# Altium PCB 202004A830.PcbDoc
Units mil, origin at the board's own origin, x right, y up, seen from the top; angles counter-clockwise.
Board outline 1891.85 x 1891.66 mil, 2 copper layers (Top Layer, Bottom Layer); 51 components, 32 nets, 164 pads, 342 vias.
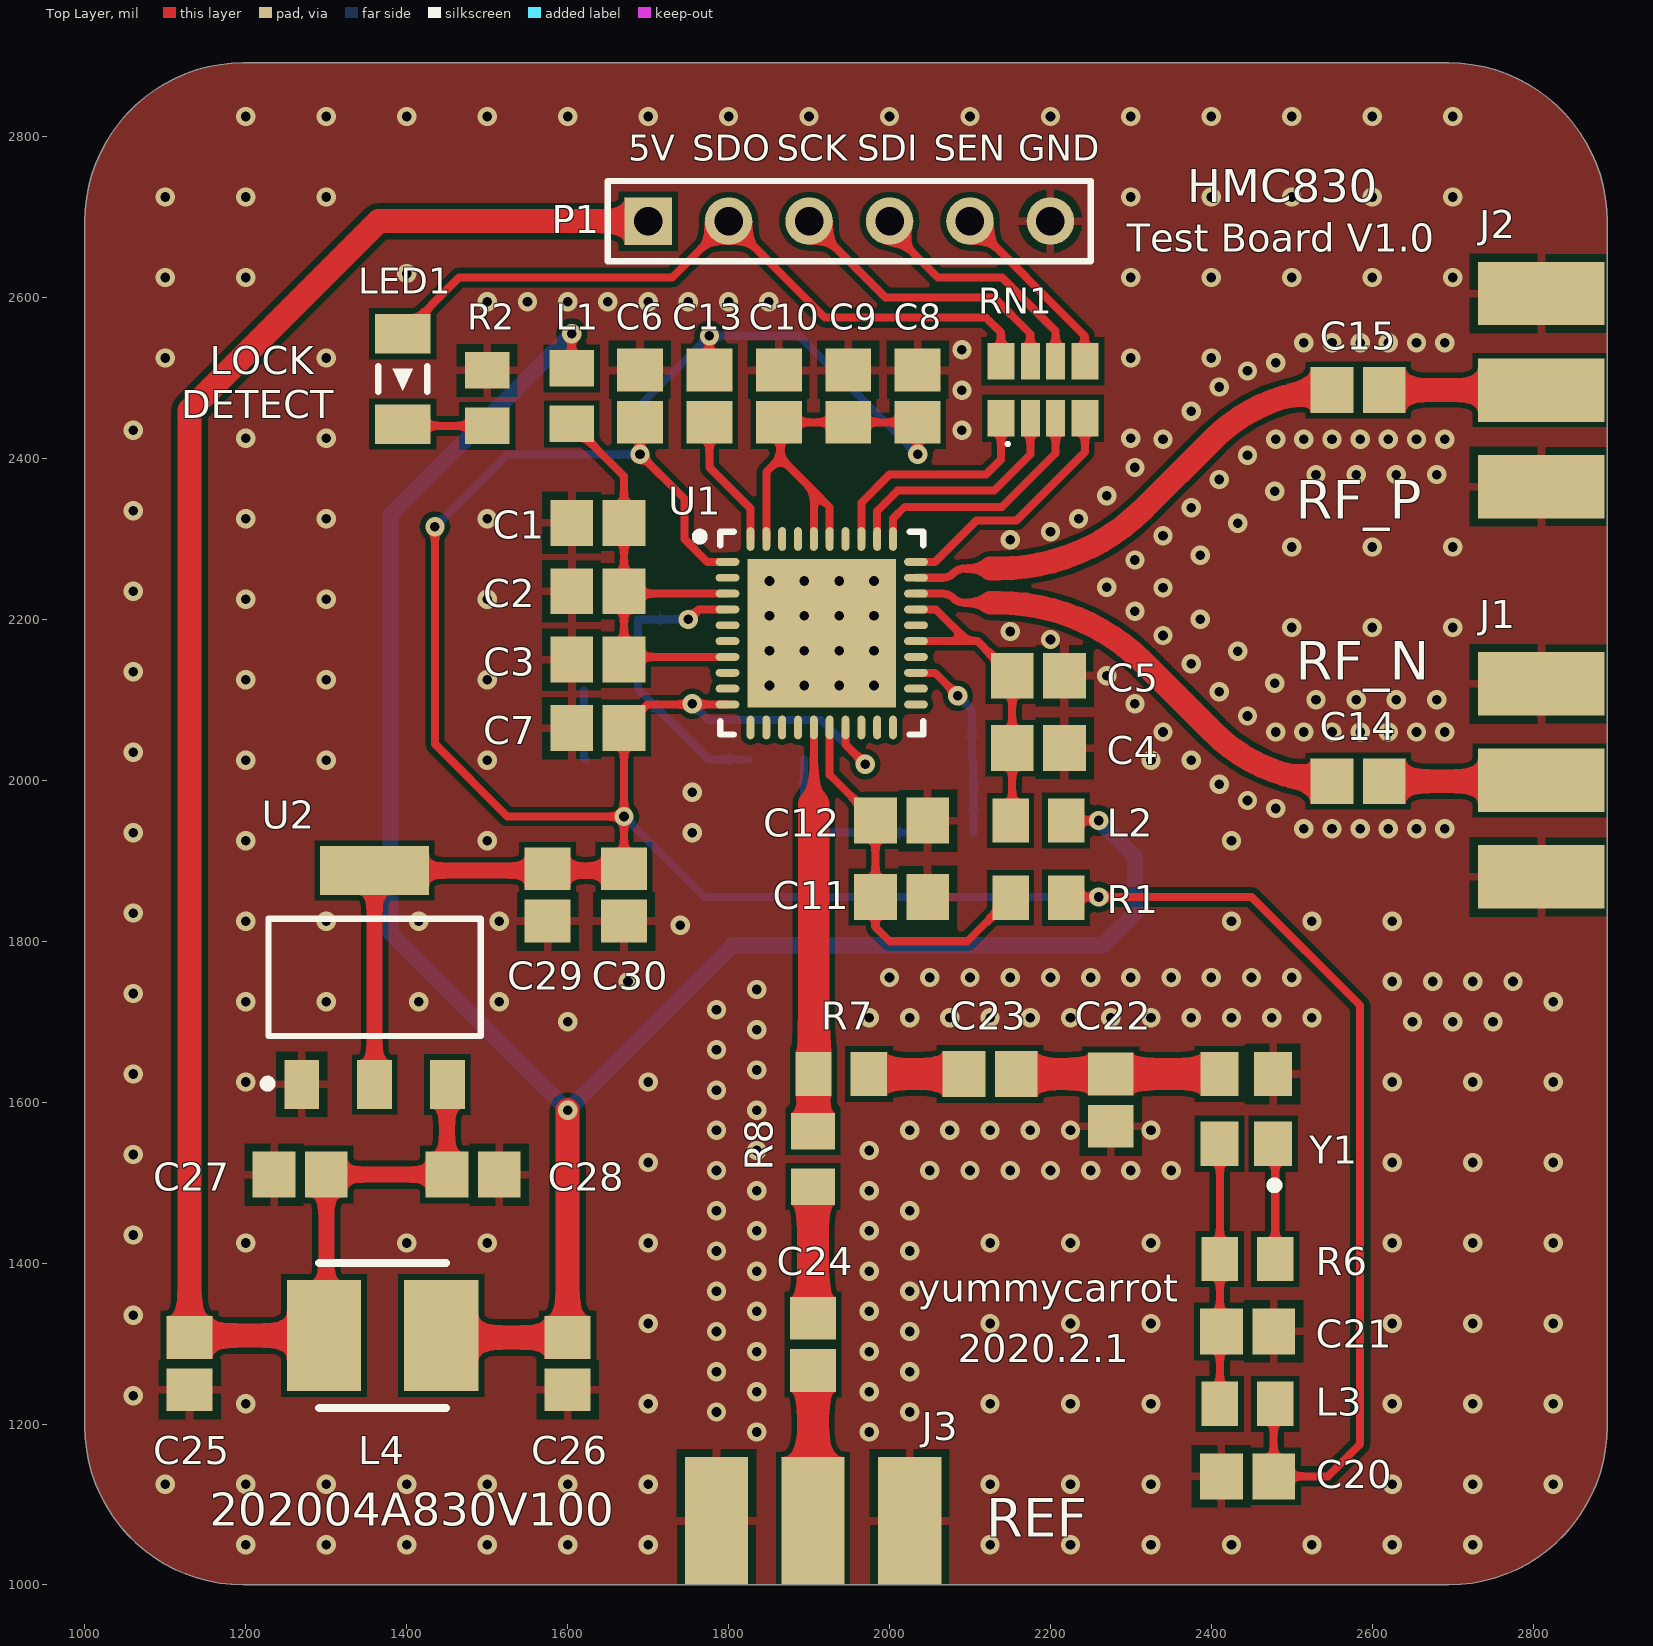
[diagram p0: Top Layer view]
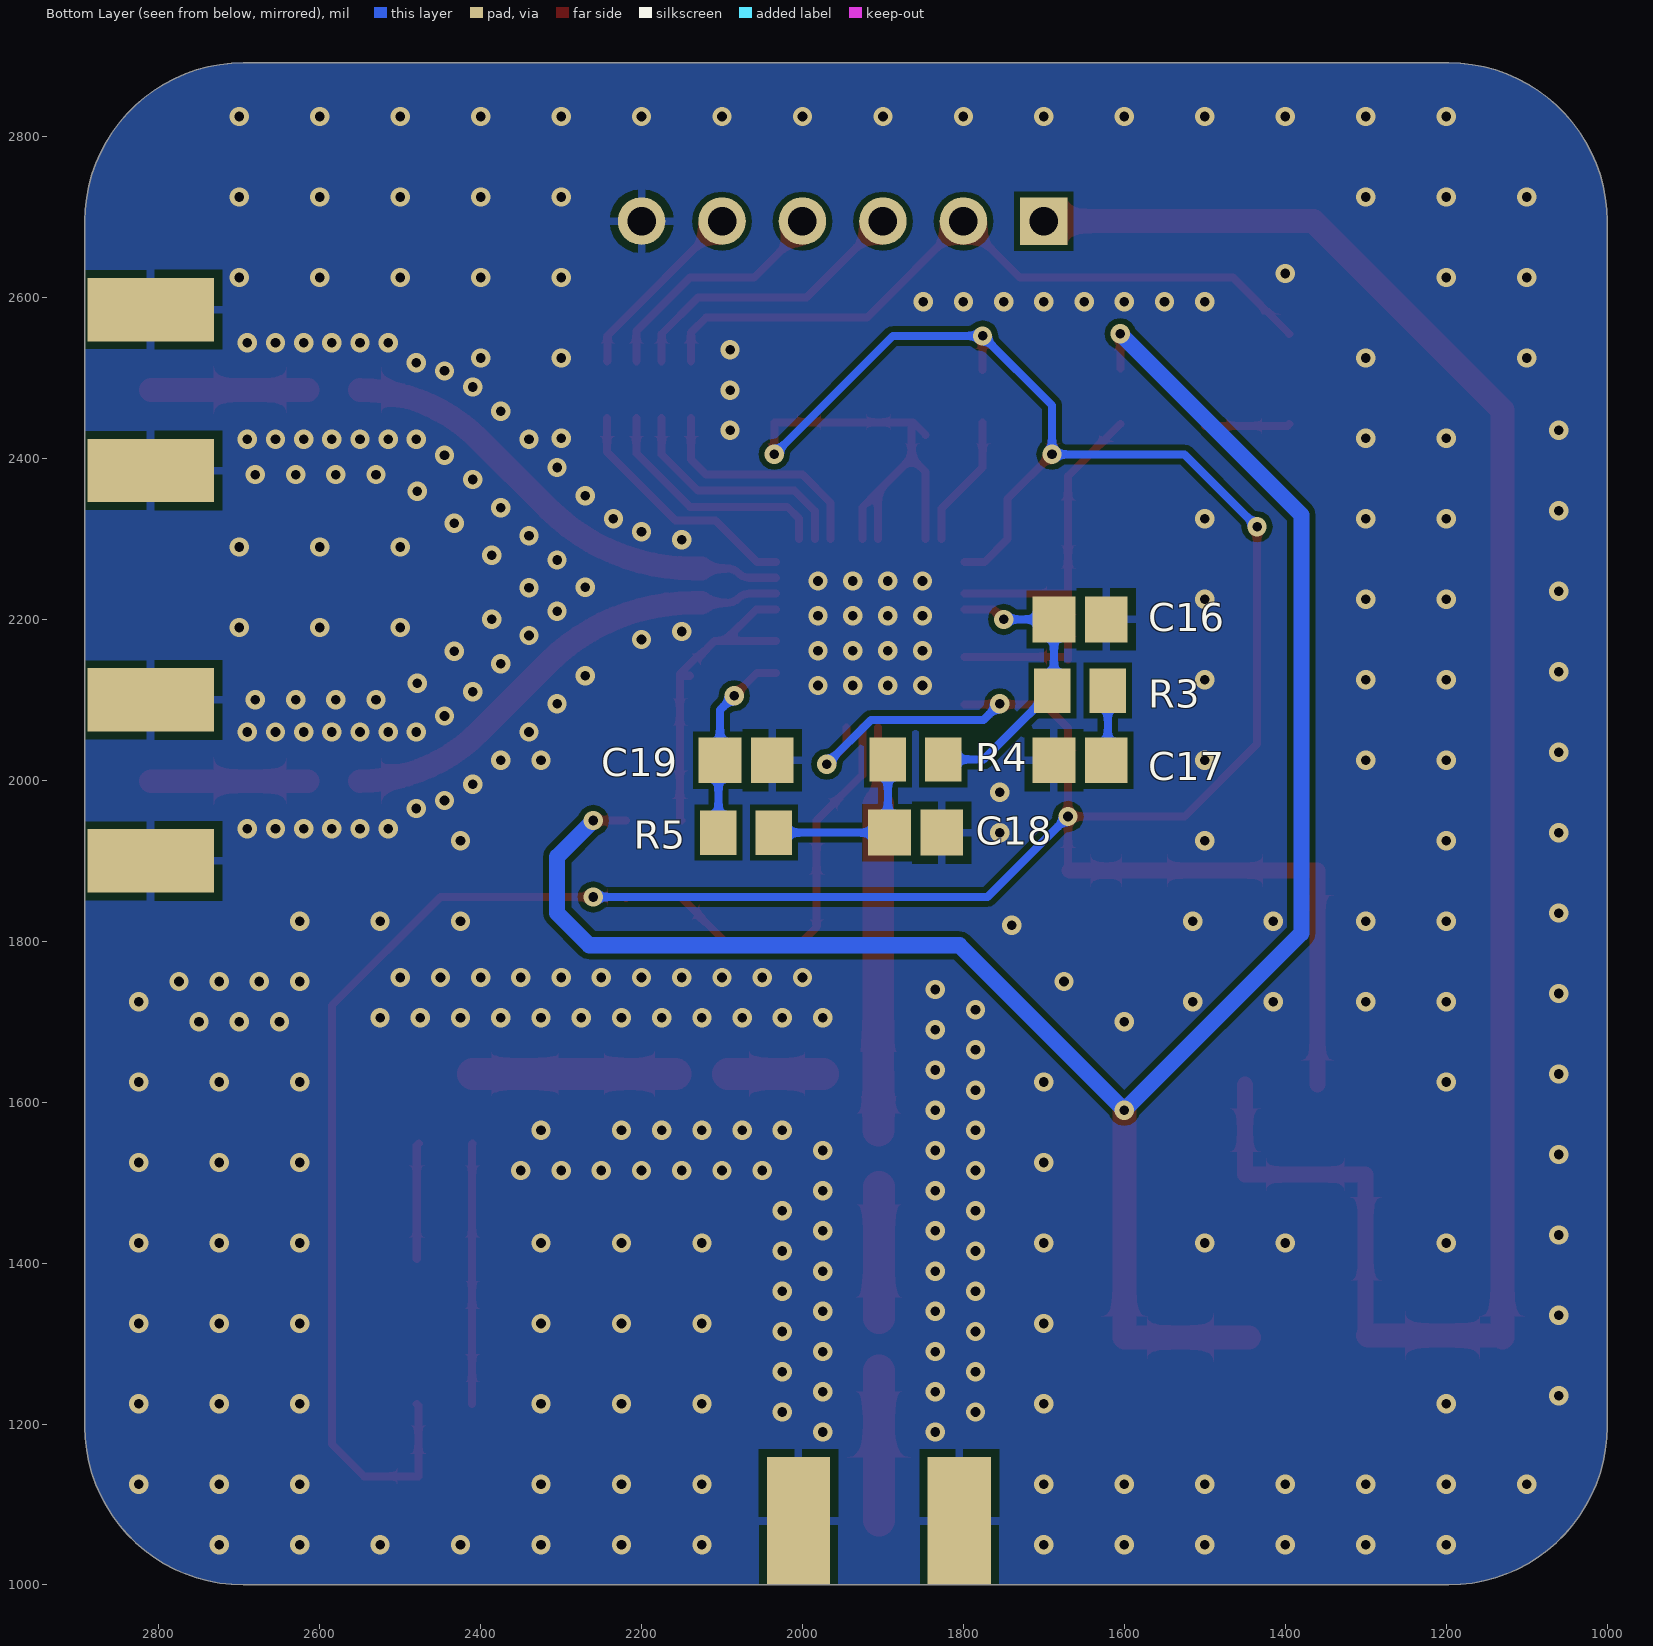
[diagram p1: Bottom Layer view, seen from below]
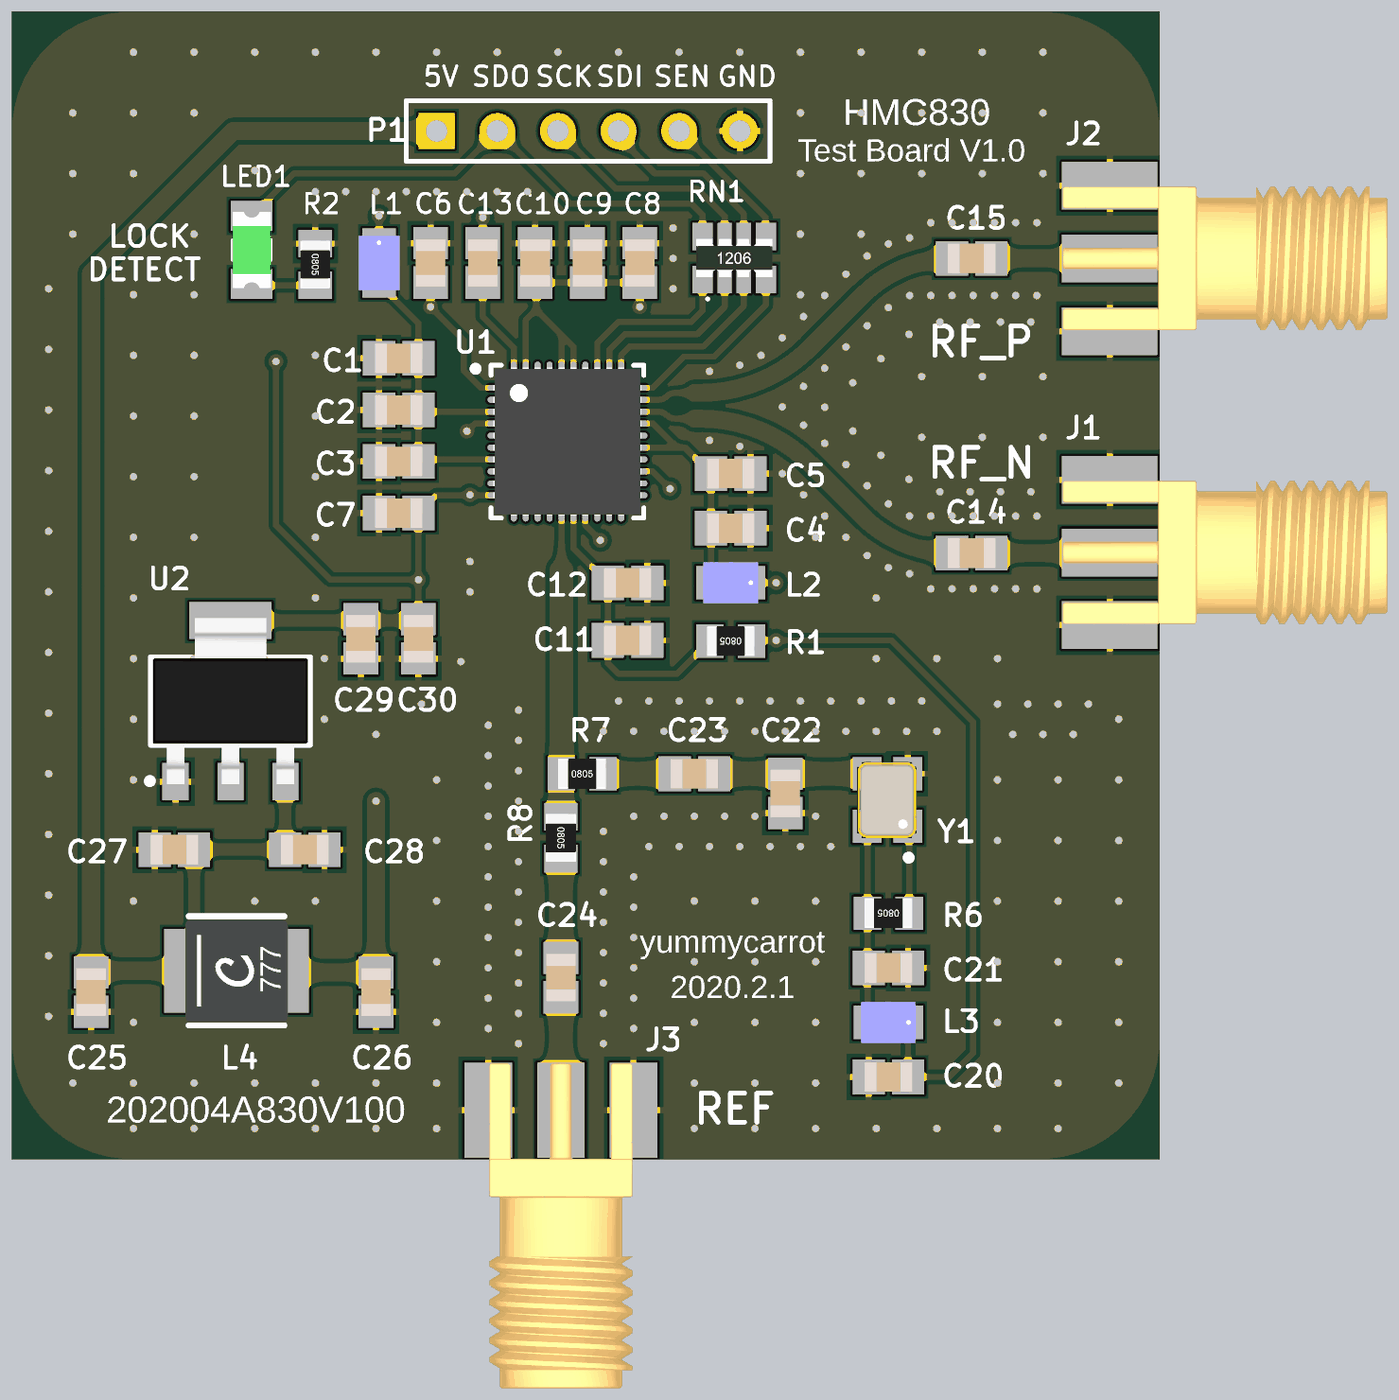
[diagram p2: 3D render of the assembled board from above, using the file's embedded part models]
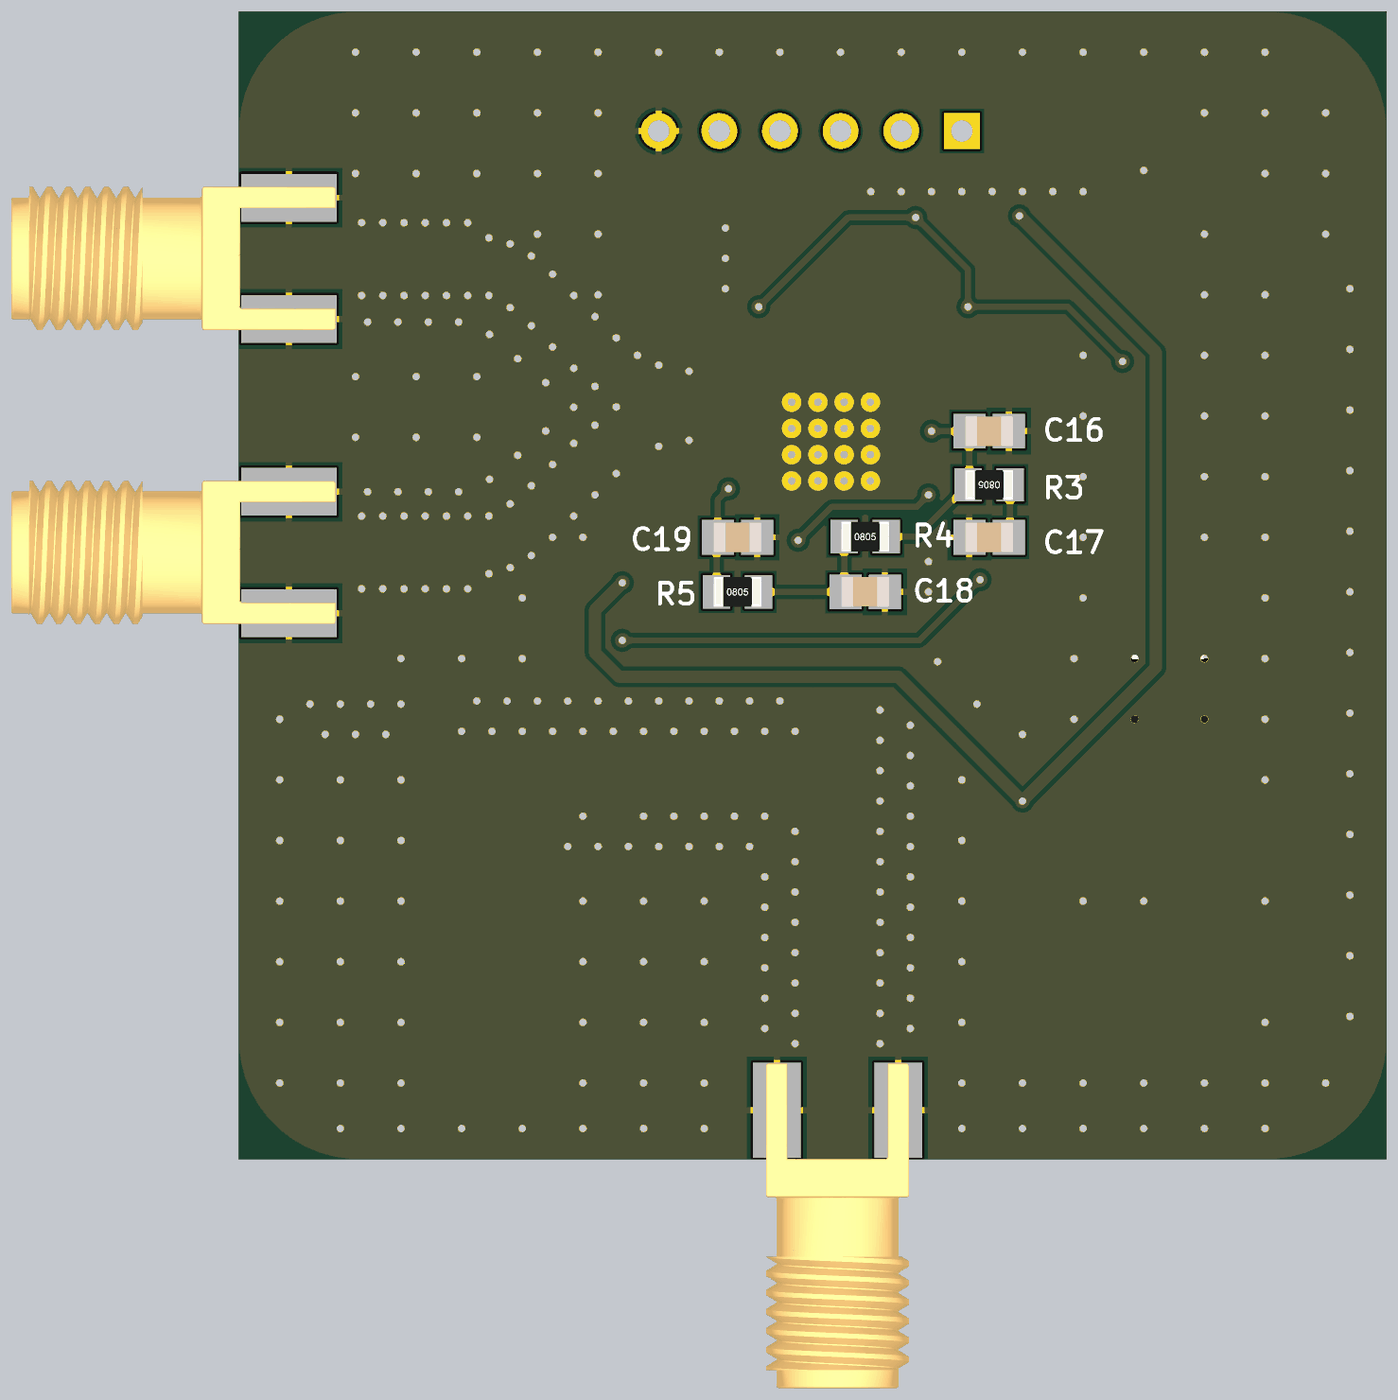
[diagram p3: 3D render of the assembled board from below, using the file's embedded part models]

## Layer stack, top to bottom
Top Solder: solder mask 0.4, Solder Resist, Dk 3.5
Top Layer: signal copper 1.4
Dielectric 1: dielectric 12.6, FR-4, Dk 4.8
Bottom Layer: signal copper 1.4
Bottom Solder: solder mask 0.4, Solder Resist, Dk 3.5

## Board outline
1000,1196.85 1000,2695 1000,2694.8 cw(c1196.85,2694.8) 1196.85,2891.66 2695,2891.66 cw(c2695,2694.8) 2891.85,2694.8 2891.85,2695 2891.85,1196.85 cw(c2695,1196.85) 2695,1000 1196.85,1000 cw(c1196.85,1196.85)

## Design rules (kind name [scope] priority, off if disabled: settings)
Clearance [All] p1: gap=7 ignorepadtopadclearanceinfootprint=TRUE
PolygonConnect [All] p1: thpad.connectstyle=Relief thpad.reliefconductorwidth=10 thpad.reliefentries=4 thpad.polygonreliefangle="90 Angle" thpad.airgapwidth=10 smdpad.connectstyle=Relief smdpad.reliefconductorwidth=10 smdpad.reliefentries=4 smdpad.polygonreliefangle="90 Angle" smdpad.airgapwidth=10 via.connectstyle=Direct via.reliefconductorwidth=10 via.reliefentries=4 via.polygonreliefangle="90 Angle" via.airgapwidth=10
RoutingVias [All] p1: holewidth=28 width=50 viastyle="Through Hole" minholewidth=12 minwidth=24 maxholewidth=28 maxwidth=50
SolderMaskExpansion [All] p1: expansion=4
Width [All] p1: maxlimit=78.74 minlimit=10 preferedwidth=10
30 further rules are at their usual default settings.

## Components (designator, comment, footprint, x,y, rotation, side; value= is the part's Value field where it differs from the comment)
C1 "Cap" C0805 1637.52,2320 r0 top value=4.7uf
C2 "Cap" C0805 1637.52,2235 r0 top value=470nf
C3 "Cap" C0805 1637.52,2150 r0 top value=470nf
C4 "Cap" C0805 2185,2040 r180 top value=470nf
C5 "Cap" C0805 2185,2130 r180 top value=22pf
C6 "Cap" C0805 1689.87,2477.48 r270 top value=470nf
C7 "Cap" C0805 1637.52,2065 r0 top value=470nf
C8 "Cap" C0805 2035,2477.48 r270 top value=4.7uf
C9 "Cap" C0805 1948.72,2477.48 r270 top value=470nf
C10 "Cap" C0805 1862.44,2477.48 r270 top value=22pf
C11 "Cap" C0805 2015,1855 r180 top value=4.7uf
C12 "Cap" C0805 2015,1950 r180 top value=470nf
C13 "Cap" C0805 1776.15,2477.48 r270 top value=1nf
C14 "Cap" C0805 2582.48,1998.86 r180 top value=100pf
C15 "Cap" C0805 2582.48,2485 r180 top value=100pf
C16 "Cap" C0805 1655,2200 r180 bottom value=150pf
C17 "Cap" C0805 1655,2025 r0 bottom value=22nf
C18 "Cap" C0805 1859.45,1935 r180 bottom value=220pf
C19 "Cap" C0805 2070,2025 r180 bottom value=220pf
C20 "Cap" C0805 2445,1135 r0 top value=4.7uf
C21 "Cap" C0805 2445,1315 r180 top value=4.7uf
C22 "Cap" C0805 2275,1602.52 r90 top value=10nf
C23 "Cap" C0805 2125,1635 r0 top value=100nf
C24 "Cap" C0805 1905,1298.9 r270 top value=100nf
C25 "Cap" C0805 1130,1275 r90 top value=4.7uf
C26 "Cap" C0805 1600,1275 r90 top value=4.7uf
C27 "Cap" C0805 1267.52,1510 r0 top value=4.7uf
C28 "Cap" C0805 1482.52,1510 r180 top value=100nf
C29 "Cap" C0805 1575,1857.52 r90 top value=4.7uf
C30 "Cap" C0805 1670,1857.52 r90 top value=100nf
J1 "SMA" SMA-3 2810,2000 r0 top
J2 "SMA" SMA-3 2810,2485 r0 top
J3 "SMA" SMA-3 1905,1080 r270 top
L1 "Inductor Chip" L0805HQ 1605,2477.48 r270 top value="100nH 300mA"
L2 "Inductor Chip" L0805HQ 2185,1950 r180 top value="100nH 300mA"
L3 "Inductor Chip" L0805HQ 2445,1225 r180 top value="4.7uH 180mA"
L4 "Inductor Iron" L4020 1370,1310 r0 top value="10uH 1.6A"
LED1 "LED" LED1206 1490,2499.96 r270 top
P1 "Header 6" HDR1X6 1700,2695 r0 top
R1 "Res" R0805 2185,1854.02 r180 top value=51R
R2 "Res" R0805 1500,2475 r270 top value=10K
R3 "Res" R0805 1655,2111.52 r0 bottom value=820R
R4 "Res" R0805 1859.45,2025.98 r180 bottom value=1K
R5 "Res" R0805 2070,1935 r180 bottom value=1K
R6 "Res" R0805 2445,1405 r180 top value=NC/10K
R7 "Res" R0805 1940,1635 r0 top value=22R
R8 "Res" R0805 1905,1529.45 r270 top value=NC
RN1 "Res Array" RA0603 2190.75,2485.43 r90 top value=22R
U1 "HMC830" HMC830 1915.79,2182.87 r0 top
U2 "SPX1117" SPX1117-SOT223 1360,1755 r0 top
Y1 "XTAL" XTAL-3225 2443.46,1591.69 r90 top value=50.000M

## Footprints (in the part's own frame and the unit in brackets; to place one, negate y for a bottom-side part, rotate by r counter-clockwise, add the part's x,y. Pads: shape width x height; smd on the part's side, far side on the other; paste and mask are expansions set on the pad)
C0805 [mm] "Chip Capacitor, 2-Leads, Body 2.01x1.25mm, IPC Medium Density"
  rect 1.35x1.45 smd: 1(-0.825,0) 2(0.825,0)
  body extent -1,-0.62 1,0.63, height 0.58
HDR1X6 [mm] "Connector; Header; 6 Position"
  rect 1.5x1.5 hole 0.9: 1(0,0)
  round 1.5 hole 0.9: 2(2.54,0) 3(5.08,0) 4(7.62,0) 5(10.16,0) 6(12.7,0)
  silkscreen extent -1.27,-1.27 13.97,1.27
HMC830 [mm] "QFN, 40-Leads, Body 6.00x6.00mm, Pitch 0.50mm, Thermal Pad 4.70x4.70mm, IPC Medium Density"
  oval 0.75x0.25 smd: 1(-2.975,2.25) 2(-2.975,1.75) 3(-2.975,1.25) 4(-2.975,0.75) 5(-2.975,0.25) 6(-2.975,-0.25) 7(-2.975,-0.75) 8(-2.975,-1.25) 9(-2.975,-1.75) 10(-2.975,-2.25) 21(2.975,-2.25) 22(2.975,-1.75) 23(2.975,-1.25) 24(2.975,-0.75) 25(2.975,-0.25) 26(2.975,0.25) 27(2.975,0.75) 28(2.975,1.25) 29(2.975,1.75) 30(2.975,2.25)
  oval 0.25x0.75 smd: 11(-2.25,-2.975) 12(-1.75,-2.975) 13(-1.25,-2.975) 14(-0.75,-2.975) 15(-0.25,-2.975) 16(0.25,-2.975) 17(0.75,-2.975) 18(1.25,-2.975) 19(1.75,-2.975) 20(2.25,-2.975) 31(2.25,2.975) 32(1.75,2.975) 33(1.25,2.975) 34(0.75,2.975) 35(0.25,2.975) 36(-0.25,2.975) 37(-0.75,2.975) 38(-1.25,2.975) 39(-1.75,2.975) 40(-2.25,2.975)
  rect 4.7x4.7 smd: 41(0,0)
  silkscreen extent -3.97,-3.2 3.2,3.2, body extent -3.1,-3.1 3.1,3.1, height 0.9
L0805HQ [mm] "Chip Inductor, 2-Leads, Body 2.00x1.25mm, IPC Medium Density"
  rect 1.15x1.4 smd: 1(-0.875,0) 2(0.875,0)
  body extent -1.14,-0.86 1.14,0.86, height 1.51
L4020 [mm] "贴片功率电感 MHCI04020"
  rect 2.35x3.5 smd: 1(-1.85,0) 2(1.85,0)
  silkscreen extent -2,-2.29 2,2.29, body extent -2.15,-2.15 2.15,2.15, height 2
LED1206 [mm] "Chip LED, 2-Leads, Body 3.20x1.60mm, IPC Medium Density"
  rect 1.25x1.75 smd: 1(-1.398,-2.413) 2(1.452,-2.413)
  silkscreen extent -0.37,-3.19 0.43,-1.64, body extent -1.57,-3.21 1.63,-1.61, height 1.1
R0805 [mm] "Chip Resistor, 2-Leads, Body 2.00x1.25mm, IPC Medium Density"
  rect 1.15x1.4 smd: 1(-0.875,0) 2(0.875,0)
  body extent -1,-0.62 1,0.63, height 0.59
RA0603 [mm] "Res Array, Chip Array, ConvexS, 8-Leads, Pitch 0.80mm,  Body 3.20x1.60mm,  IPC Low Density"
  rect 1.15x0.85 smd: 1(-0.9,1.325) 4(-0.9,-1.325) 5(0.9,-1.325) 8(0.9,1.325)
  rect 1.15x0.6 smd: 2(-0.9,0.4) 3(-0.9,-0.4) 6(0.9,-0.4) 7(0.9,0.4)
  silkscreen extent -1.76,1.06 -1.66,1.16, body extent -0.8,-1.6 0.8,1.6, height 0.5
SMA-3 [mm]
  rect 4x2 smd: 1(0,0) 2(0,-3.048) 2(0,3.048)
  rect 4x2 smd far side: 2(0,-2.54) 2(0,2.54)
  body extent -1.97,-3 11.63,3, height 3.45
SPX1117-SOT223 [mm] "SOT-223"
  rect 1.1x1.55 smd: 1(-2.3,-3.375) 2(0,-3.375) 3(2.3,-3.375)
  rect 3.45x1.55 smd: 2(0,3.375)
  silkscreen extent -3.5,-3.48 3.35,1.85, body extent -3.25,-3.48 3.25,3.48, height 1.66
XTAL-3225 [mm] "4脚3225贴片晶振"
  rect 1.4x1.2 smd: 1(-1.1,-0.85) 2(1.1,-0.85) 3(1.1,0.85) 4(-1.1,0.85)
  silkscreen extent -2.54,-1.01 -2.29,-0.76, body extent -1.6,-1.23 1.6,1.27, height 0.61

## Part data
L1 L2 L3: "Chip Inductor"
L4: "Magnetic-Core Inductor"
P1: "Header, 6-Pin", LatestRevisionDate=17-Jul-2002, LatestRevisionNote="Re-released for DXP Platform.", Publisher="Altium Limited"
R1 R2 R3 R4 R5 R6 R7 R8: "电阻"
RN1: library part "Res Array 2", "贴片排阻"
U1: "Fractional-N PLL with Integrated VCO, 25 - 3000 MHz"
U2: "800mA Low Dropout Voltage Regulator"
Y1: library part XTAL2, "有源晶振"

## Via types
v1: diameter 24, hole 12, Top Layer to Bottom Layer, tented both sides, 326 vias
v2: diameter 24, hole 12, Top Layer to Bottom Layer, 16 vias

## Nets (pads, with @x,y where several pads share a name; then routed paths per layer and width w, separated by ;. In a path a pad name is that pad's centre, name@x,y a point inside that pad or via, vN(x,y) a via of type N, cw(c..) or ccw(c..) an arc to the next point about the centre after c; other vN are vias at no path point)
+5V: C25.2 C27.2 C28.2 L4.1 P1.1 U2.3 | length 2451.6
  Top Layer w10: C25.2 C25.2@1132.51,1309.99 ; L4.1 L4.1@1300,1312.82 ; U2.3@1450.04,1621.62 U2.3
  Top Layer w20: L4.1@1300,1312.82 C27.2 C28.2 U2.3@1450.04,1621.62
  Top Layer w30: C25.2 1130,2460 1365,2695 P1.1 ; C25.2@1132.51,1309.99 L4.1
GND: C1.1 C2.1 C3.1 C4.1 C5.1 C6.1 C7.1 C8.1 C9.1 C10.1 C11.1 C12.1 C16.2 C17.2 C18.2 C19.2 C20.1 C21.1 C22.1 C25.1 C26.1 C27.1 C28.1 C29.1 C30.1 J1.2 J2.2 J3.2 P1.6 R2.1 U1.41 U2.1 Y1.2
  other v1: 1200,1050 1300,1050 1400,1050 1500,1050 1600,1050 1700,1050 2125,1050 2225,1050 2325,1050 2425,1050 2525,1050 2625,1050 2725,1050 1100,1125 1200,1125 1300,1125 1400,1125 1500,1125 1600,1125 1700,1125 2125,1125 2225,1125 2325,1125 2625,1125 2725,1125 2825,1125 1835,1190 1975,1190 1785,1215 2025,1215 1200,1225 1700,1225 2125,1225 2225,1225 2325,1225 2625,1225 2725,1225 2825,1225 1060,1235 1835,1240 1975,1240 1785,1265 2025,1265 1835,1290 1975,1290 1785,1315 2025,1315 1700,1325 2125,1325 2225,1325 2325,1325 2625,1325 2725,1325 2825,1325 1060,1335 1835,1340 1975,1340 1785,1365 2025,1365 1835,1390 1975,1390 1785,1415 2025,1415 1200,1425 1400,1425 1500,1425 1700,1425 2125,1425 2225,1425 2325,1425 2625,1425 2725,1425 2825,1425 1060,1435 1835,1440 1975,1440 1785,1465 2025,1465 1835,1490 1975,1490 1785,1515 2050,1515 2100,1515 2150,1515 2200,1515 2250,1515 2300,1515 2350,1515 1700,1525 2625,1525 2725,1525 2825,1525 1060,1535 1835,1540 1975,1540 1785,1565 2025,1565 2075,1565 2125,1565 2175,1565 2225,1565 2325,1565 1835,1590 1785,1615 1200,1625 1700,1625 2625,1625 2725,1625 2825,1625 1060,1635 1835,1640 1785,1665 1835,1690 1600,1700 2650,1700 2700,1700 2750,1700 1975,1705 2025,1705 2075,1705 2125,1705 2175,1705 2225,1705 2275,1705 2325,1705 2375,1705 2425,1705 2475,1705 2525,1705 1785,1715 1200,1725 1300,1725 1415,1725 1515,1725 2825,1725 1060,1735 1835,1740 1675,1750 2625,1750 2675,1750 2725,1750 2775,1750 2000,1755 2050,1755 2100,1755 2150,1755 2200,1755 2250,1755 2300,1755 2350,1755 2400,1755 2450,1755 2500,1755 1740,1820 1200,1825 1300,1825 1415,1825 1515,1825 2425,1825 2525,1825 2625,1825 1060,1835 1200,1925 1500,1925 2425,1925 1060,1935 1755,1935 2515,1940 2550,1940 2585,1940 2620,1940 2655,1940 2690,1940 2480,1965 2445,1975 1755,1985 2410,1995 1200,2025 1300,2025 1500,2025 2325,2025 2375,2025 1060,2035 2340,2060 2480,2060 2515,2060 2550,2060 2585,2060 2620,2060 2655,2060 2690,2060 2445,2080 2305,2095 2530,2100 2580,2100 2630,2100 2680,2100 2410,2110 2478.96,2120.55 1200,2125 1300,2125 1500,2125 2270,2130 1060,2135 2375,2145 2432.64,2160.37 2200,2175 2340,2180 2150,2185 2500,2190 2600,2190 2700,2190 2386.32,2200.18 2305,2210 1200,2225 1300,2225 1500,2225 1060,2235 2340,2239.39 2270,2240 2305,2273.86 2386.32,2279.82 2500,2290 2600,2290 2700,2290 2150,2298.86 2340,2303.86 2200,2308.86 2432.64,2319.63 1200,2325 1300,2325 1500,2325 2235,2325 1060,2335 2375,2338.86 2270,2353.86 2478.96,2359.45 2410,2373.86 2530,2380 2580,2380 2630,2380 2680,2380 2305,2388.86 2445,2403.86 2340,2423.86 2480,2423.86 2515,2423.86 2550,2423.86 2585,2423.86 2620,2423.86 2655,2423.86 2690,2423.86 1200,2425 1300,2425 2300,2425 1060,2435 2090,2435 2375,2458.86 2090,2485 2410,2488.86 2445,2508.86 2480,2518.86 1100,2525 1300,2525 2300,2525 2400,2525 2090,2535 2515,2543.86 2550,2543.86 2585,2543.86 2620,2543.86 2655,2543.86 2690,2543.86 1500,2595 1550,2595 1600,2595 1650,2595 1700,2595 1750,2595 1800,2595 1850,2595 1100,2625 1200,2625 2300,2625 2400,2625 2500,2625 2600,2625 2700,2625 1400,2630 1100,2725 1200,2725 1300,2725 2300,2725 2400,2725 2500,2725 2600,2725 2700,2725 1200,2825 1300,2825 1400,2825 1500,2825 1600,2825 1700,2825 1800,2825 1900,2825 2000,2825 2100,2825 2200,2825 2300,2825 2400,2825 2500,2825 2600,2825 2700,2825
  other v2: 1850.83,2117.91 1894.13,2117.91 1937.44,2117.91 1980.75,2117.91 1850.83,2161.22 1894.13,2161.22 1937.44,2161.22 1980.75,2161.22 1850.83,2204.53 1894.13,2204.53 1937.44,2204.53 1980.75,2204.53 1850.83,2247.83 1894.13,2247.83 1937.44,2247.83 1980.75,2247.83
HMC830_3V3: C6.2 C7.2 C8.2 C9.2 C10.2 C13.1 C20.2 C29.2 C30.2 L3.1 R1.1 U1.1 U1.10 U1.17 U1.35 U1.36 U1.39 U2.2 | length 5197.8
  Top Layer w10: v1(1435,2315) 1435,2045 1525,1955 v1(1670,1955) ; C30.2@1667.87,1887.87 C30.2 v1(1670,1955) ; C6.2 v1(1689.87,2405.13) 1745,2350 1745,2300 1773.54,2271.46 U1.1 ; C13.1 v1(1776.15,2552.37) v1@1780,2556.21 ; U1.10 1699.29,2094.29 C7.2 v1(1670,1955) ; U1.39 1846.89,2383.08 1864.4,2400.6 ; C10.2@1846.89,2429.45 C10.2 C10.2@1864.4,2445 ; U1.36 1905.94,2359.06 ; U1.35 1925.63,2339.37 1905.94,2359.06 ; U1.17 1945.31,2044.69 v1(1970,2020) ; v1(2035,2405.13) C8.2 C9.2 C10.2@1864.4,2445 ; R1.1 2220.43,1855 v1(2260,1855) 2450,1855 2585,1720 2585,1175 2545,1135 C20.2 2477.48,1223.03 L3.1 ; 1864.4,2400.6 C10.2@1864.4,2445 ; 1864.4,2400.6 1905.94,2359.06
  Top Layer w20: U2.2@1360,1622.13 1360,1887.87 C30.2@1667.87,1887.87
  Bottom Layer w10: v1(1435,2315) 1525.13,2405.13 v1(1689.87,2405.13) 1689.87,2466.08 v1(1776.15,2552.37) 1887.76,2552.37 v1(2035,2405.13) ; v1(1670,1955) 1770,1855 v1(2260,1855) ; v1(1755,2095) 1775,2075 1915,2075 v1(1970,2020)
HMC830_5V: C26.2 L1.1 L2.1 L4.2 | length 2613.8
  Top Layer w10: L4.2 L4.2@1445.34,1307.48 ; L1.1 v1(1605,2555) ; L2.1@2219.45,1950 v1(2260,1950)
  Top Layer w30: L4.2@1445.34,1307.48 C26.2 v1(1600,1590)
  Bottom Layer w20: v1(1605,2555) 1380,2330 1380,1810 v1(1600,1590) 1805,1795 2265,1795 2305,1835 2305,1905 v1(2260,1950)
HMC830_SCK: P1.3 RN1.7 | length 367.1
  Top Layer w10: P1.3 1995,2600 2130,2600 2175,2555 RN1.7
HMC830_SDI: P1.4 RN1.6 | length 306.5
  Top Layer w10: P1.4 2000,2685 2060,2625 2140,2625 2206.5,2558.5 RN1.6
HMC830_SDO: LED1.1 P1.2 RN1.8 | length 894.5
  Top Layer w10: LED1.1 1465,2625 1730,2625 P1.2 1920,2575 2120,2575 2138.58,2556.42 RN1.8
HMC830_SEN: P1.5 RN1.5 | length 233.3
  Top Layer w10: P1.5 2242.35,2552.65 2242.35,2521.43 RN1.5
NetC1_2: C1.2 C2.2 C3.2 L1.2 U1.3 U1.7 | length 579.9
  Top Layer w10: L1.2 1670,2378.03 C1.2 C2.2 ; U1.7 1673.35,2153.35 C3.2 C2.2 ; U1.3 1672.91,2232.09 C2.2
NetC4_2: C4.2 C5.2 L2.2 U1.25 U1.27 | length 412.4
  Top Layer w10: U1.25 2096.97,2173.03 ; U1.27 2057.4,2212.4 2057.5,2212.5 2096.97,2173.03 ; C5.2@2140,2130 C5.2 ; L2.2 2152.52,1951.97 C4.2 C5.2 ; 2096.97,2173.03 2109.49,2173.03 2128.98,2153.54 2130.94,2153.54 2152.52,2131.97 C5.2
NetC11_2: C11.2 C12.2 R1.2 U1.16 | length 469.5
  Top Layer w10: U1.16 1925.63,2006.89 C12.2 C11.2 1982.52,1817.48 2000,1800 2096.54,1800 R1.2
NetC13_2: C13.2 U1.40 | length 166.1
  Top Layer w10: C13.2 1776.15,2388.85 1827.2,2337.8 U1.40
NetC14_1: C14.1 J1.1 | length 195
  Top Layer w29.53: C14.1 J1.1@2810,1998.86
NetC14_2: C14.2 U1.28 | length 592
  Top Layer w10: U1.28 2065.72,2232.09 cw(c2065.72,2212.4) 2079.6,2226.37 ccw(c2093.51,2240.29) 2093.51,2220.61 2125.59,2220.61
  Top Layer w29.53: 2125.59,2220.61 2135.59,2220.61 cw(c2135.59,1964.7) 2316.54,2145.66 2402.06,2060.14 ccw(c2550,2208.08) C14.2
NetC15_1: C15.1 J2.1 | length 195
  Top Layer w29.53: C15.1 J2.1
NetC15_2: C15.2 U1.29 | length 592
  Top Layer w10: U1.29 2065.72,2251.77 ccw(c2065.72,2271.46) 2079.6,2257.49 cw(c2093.51,2243.56) 2093.51,2263.25 2125.59,2263.25
  Top Layer w29.53: 2125.59,2263.25 2135.59,2263.25 ccw(c2135.59,2519.15) 2316.54,2338.2 2402.06,2423.72 cw(c2550,2275.78) C15.2
NetC16_1: C16.1 R3.2 R4.2 U1.4 | length 376.6
  Top Layer w10: v1(1750,2200) 1750.46,2200 1762.86,2212.4 U1.4
  Bottom Layer w10: v1(1750,2200) C16.1 1687.48,2113.48 R3.2 1774.98,2025.98 R4.2
NetC17_1: C17.1 R3.1 | length 87.3
  Bottom Layer w10: R3.1 1620.55,2026.97 C17.1
NetC18_1: C18.1 R4.1 R5.2 | length 235.4
  Bottom Layer w10: R4.1 1893.9,1936.97 C18.1 R5.2
NetC19_1: C19.1 R5.1 U1.23 | length 242
  Top Layer w10: U1.23 2056.34,2133.66 v1(2085,2105)
  Bottom Layer w10: v1(2085,2105) 2102.48,2087.52 C19.1 2104.45,2023.03 R5.1
NetC21_2: C21.2 L3.2 R6.2 Y1.4 | length 323.6
  Top Layer w10: Y1.4 2410.55,1547.83 R6.2 L3.2
NetC22_2: C22.2 C23.2 Y1.3 | length 252.5
  Top Layer w39.37: C23.2 C22.2 Y1.3
NetC23_1: C23.1 R7.2 | length 118.1
  Top Layer w39.37: R7.2 C23.1
NetC24_1: C24.1 R8.2 | length 163.6
  Top Layer w39.37: C24.1 R8.2
NetC24_2: C24.2 J3.1 | length 186.4
  Top Layer w39.37: J3.1 C24.2
NetLED1_2: LED1.2 R2.2 | length 105.9
  Top Layer w10: LED1.2 1397.24,2440.55 R2.2
NetR6_1: R6.1 Y1.1 | length 144.4
  Top Layer w10: Y1.1 2479.45,1545.87 R6.1
NetRN1_1: RN1.1 U1.33 | length 292.2
  Top Layer w10: U1.33 1965,2345 2000,2380 2120,2380 2138.58,2398.58 RN1.1
NetRN1_2: RN1.2 U1.32 | length 299.1
  Top Layer w10: U1.32 1984.68,2334.68 2010,2360 2130,2360 2175,2405 RN1.2
NetRN1_3: RN1.3 U1.31 | length 304.6
  Top Layer w10: U1.31 2004.37,2325.33 2019.04,2340 2140,2340 2206.5,2406.5 RN1.3
NetRN1_4: RN1.4 U1.30 | length 308.6
  Top Layer w10: U1.30 2056.46,2271.46 2108,2323 2158,2323 2242.91,2407.91 RN1.4
XREFP: R7.1 R8.1 U1.15 | length 501.7
  Top Layer w10: R8.1 R8.1@1905.55,1564.45 ; 1905.94,1970 U1.15
  Top Layer w39.37: R8.1@1905.55,1564.45 R7.1 ; R7.1@1905.94,1635.39 1905.94,1970
pads on no net: U1.2 U1.5 U1.6 U1.8 U1.9 U1.11 U1.12 U1.13 U1.14 U1.18 U1.19 U1.20 U1.21 U1.22 U1.24 U1.26 U1.34 U1.37 U1.38

## Polygon pours and split planes (outlines as drawn)
GND on Top Layer (solid, remove dead copper, pour order 1): 1000,1196.85 1000,2695 1000,2694.8 cw(c1196.85,2694.8) 1196.85,2891.66 2695,2891.66 cw(c2695,2694.8) 2891.85,2694.8 2891.85,2695 2891.85,1196.85 cw(c2695,1196.85) 2695,1000 1196.85,1000 cw(c1196.85,1196.85)
GND on Bottom Layer (solid, remove dead copper, pour order 3): 1000,1196.85 1000,2695 1000,2694.8 cw(c1196.85,2694.8) 1196.85,2891.66 2695,2891.66 cw(c2695,2694.8) 2891.85,2694.8 2891.85,2695 2891.85,1196.85 cw(c2695,1196.85) 2695,1000 1196.85,1000 cw(c1196.85,1196.85)

## Silkscreen, mask and mechanical layers (free items; w line width, h text height)
Top Overlay:
  text "5V" at 1675,2770 h32
  text "SDO" at 1755,2770 h32
  text "SCK" at 1860,2770 h32
  text "SDI" at 1960,2770 h32
  text "SEN" at 2055,2770 h32
  text "GND" at 2160,2770 h32
  text "HMC830" at 2370,2705 h70
  text "Test Board V1.0" at 2295,2645 h60
  text "LOCK" at 1155,2505 h35
  text "DETECT" at 1120,2450 h35
  text "RF_P" at 2505,2325 h48
  text "RF_N" at 2505,2125 h48
  text "yummycarrot" at 2035,1340 h60
  text "2020.2.1" at 2085,1265 h60
  text "202004A830V100" at 1155,1060 h70
  text "REF" at 2120,1060 h48
Mechanical 1:
  lines w10: 1000,2694.8 cw(c1196.85,2694.8) 1196.85,2891.66 2695,2891.66 cw(c2695,2694.8) 2891.85,2694.8 ; 1000,2695 1000,1196.85 ccw(c1196.85,1196.85) 1196.85,1000 2695,1000 ccw(c2695,1196.85) 2891.85,1196.85 2891.85,2695